# Altium PCB STM32F030F4P6_dev_board.PcbDoc
Units mm, origin at the board's own origin, x right, y up, seen from the top; angles counter-clockwise.
Board outline 35.56 x 29.54 mm, 2 copper layers (Top Layer, Bottom Layer); 18 components, 24 nets, 72 pads, 69 vias.
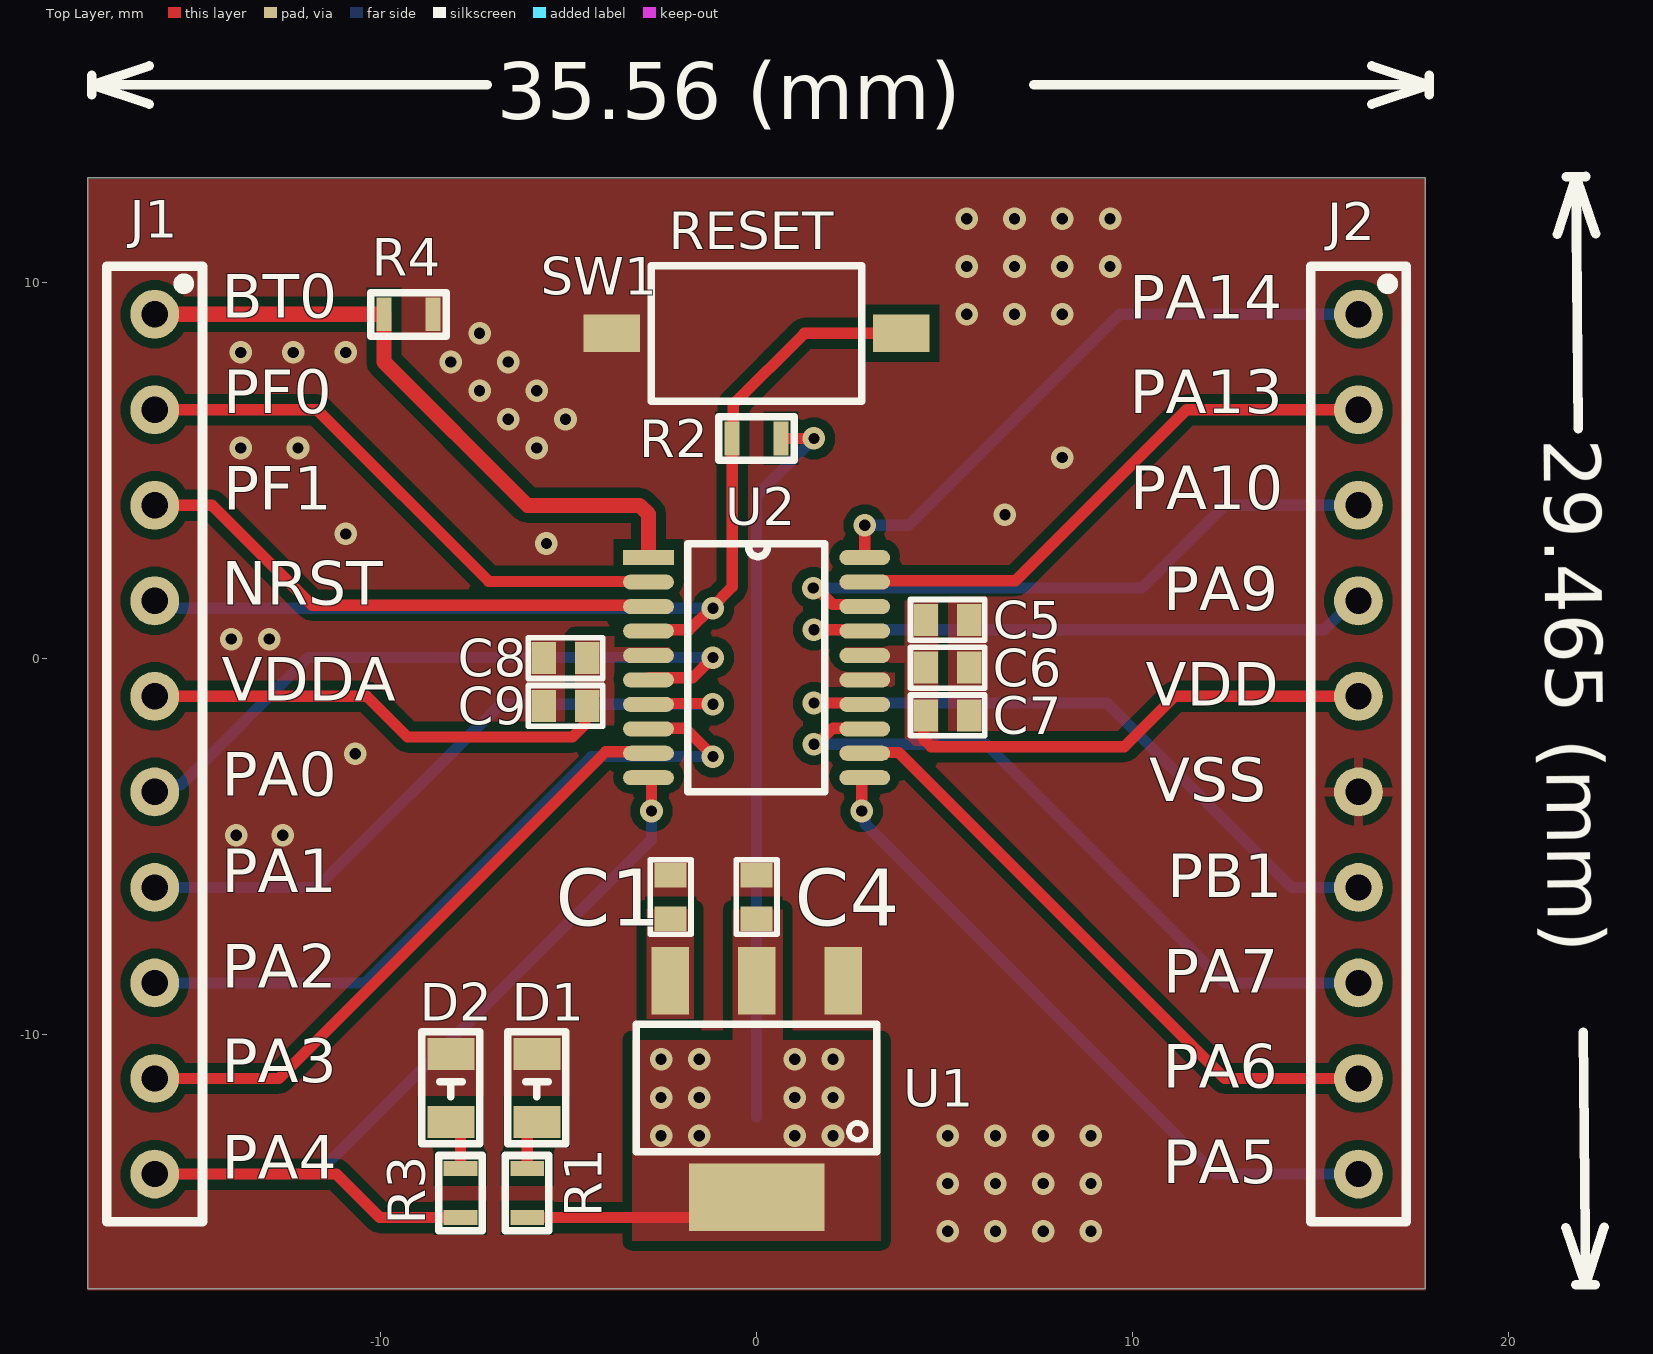
[diagram p0: Top Layer view]
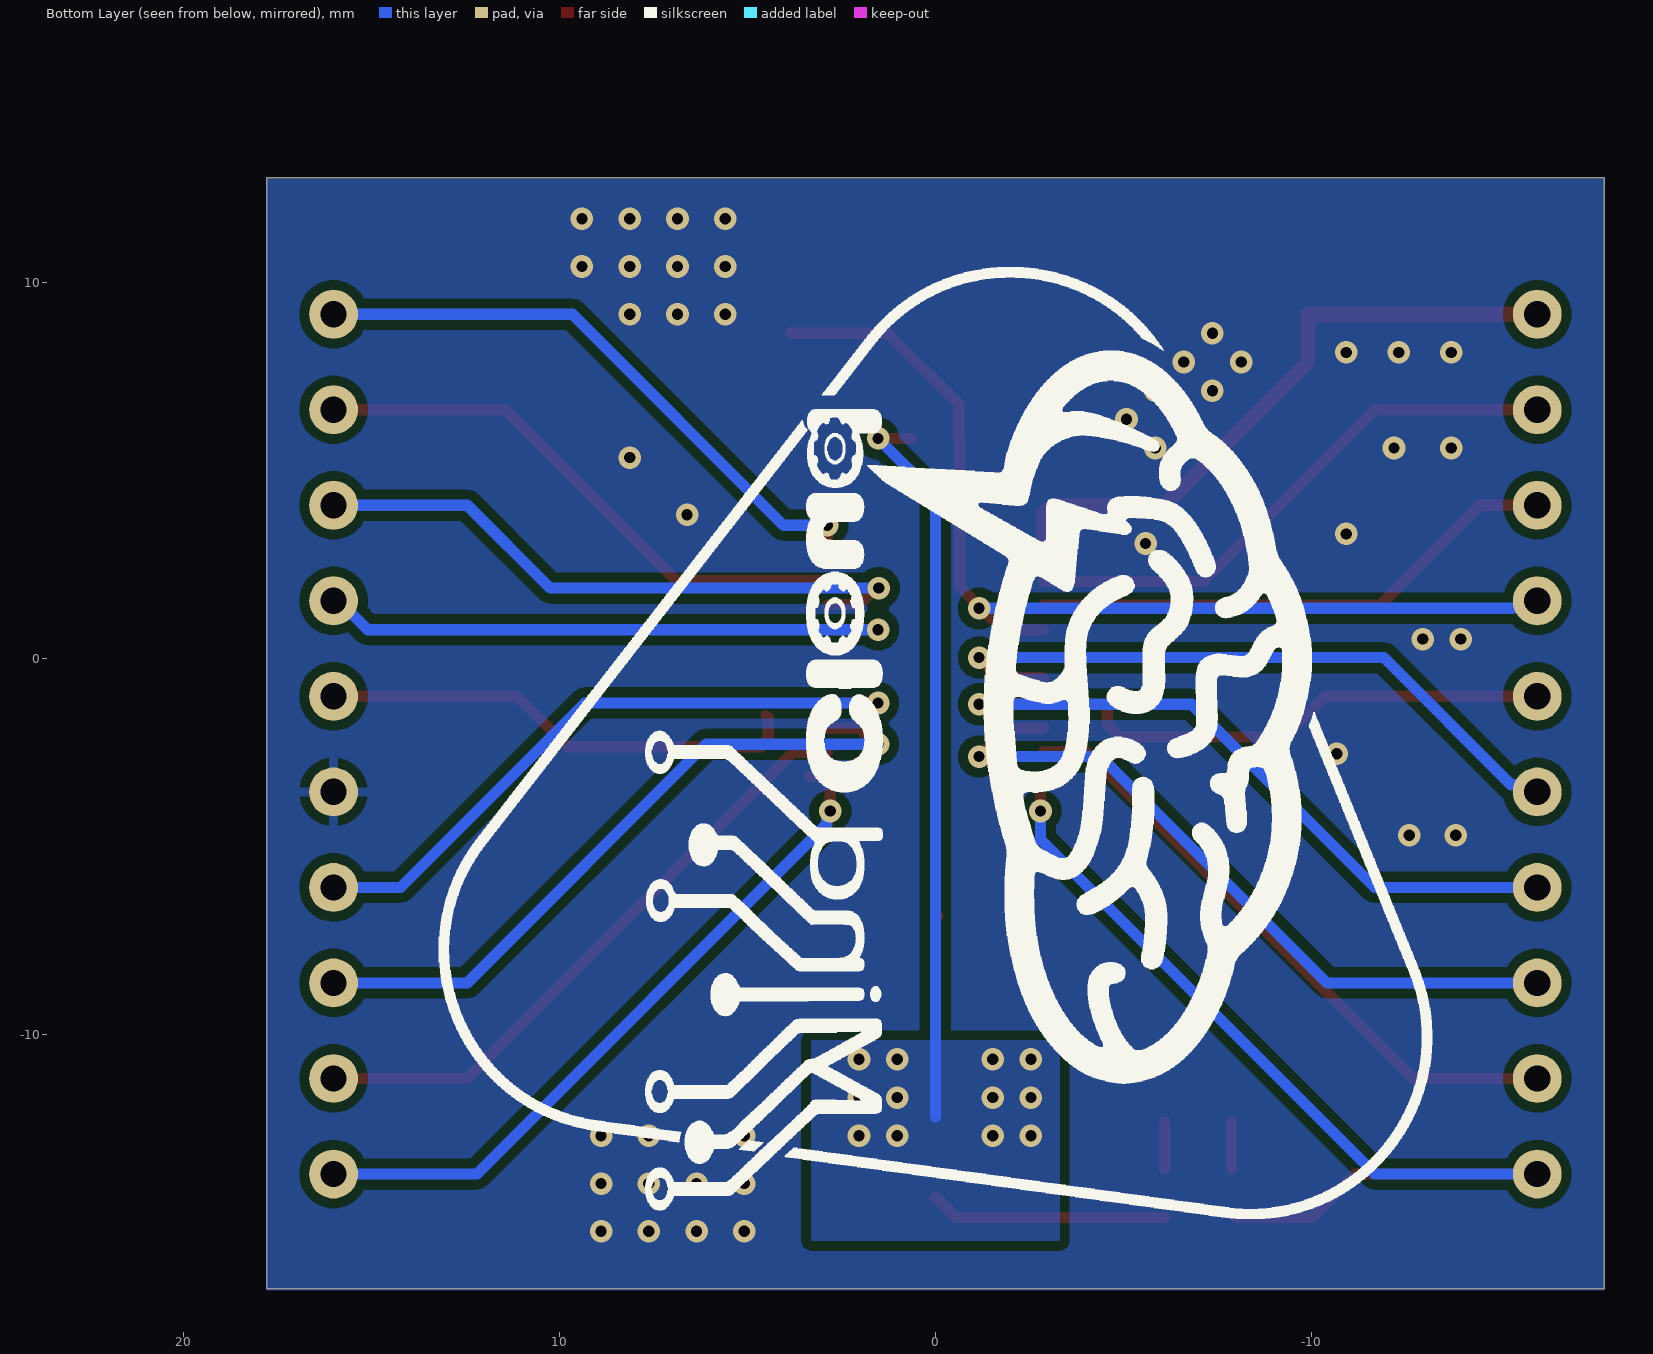
[diagram p1: Bottom Layer view, seen from below]
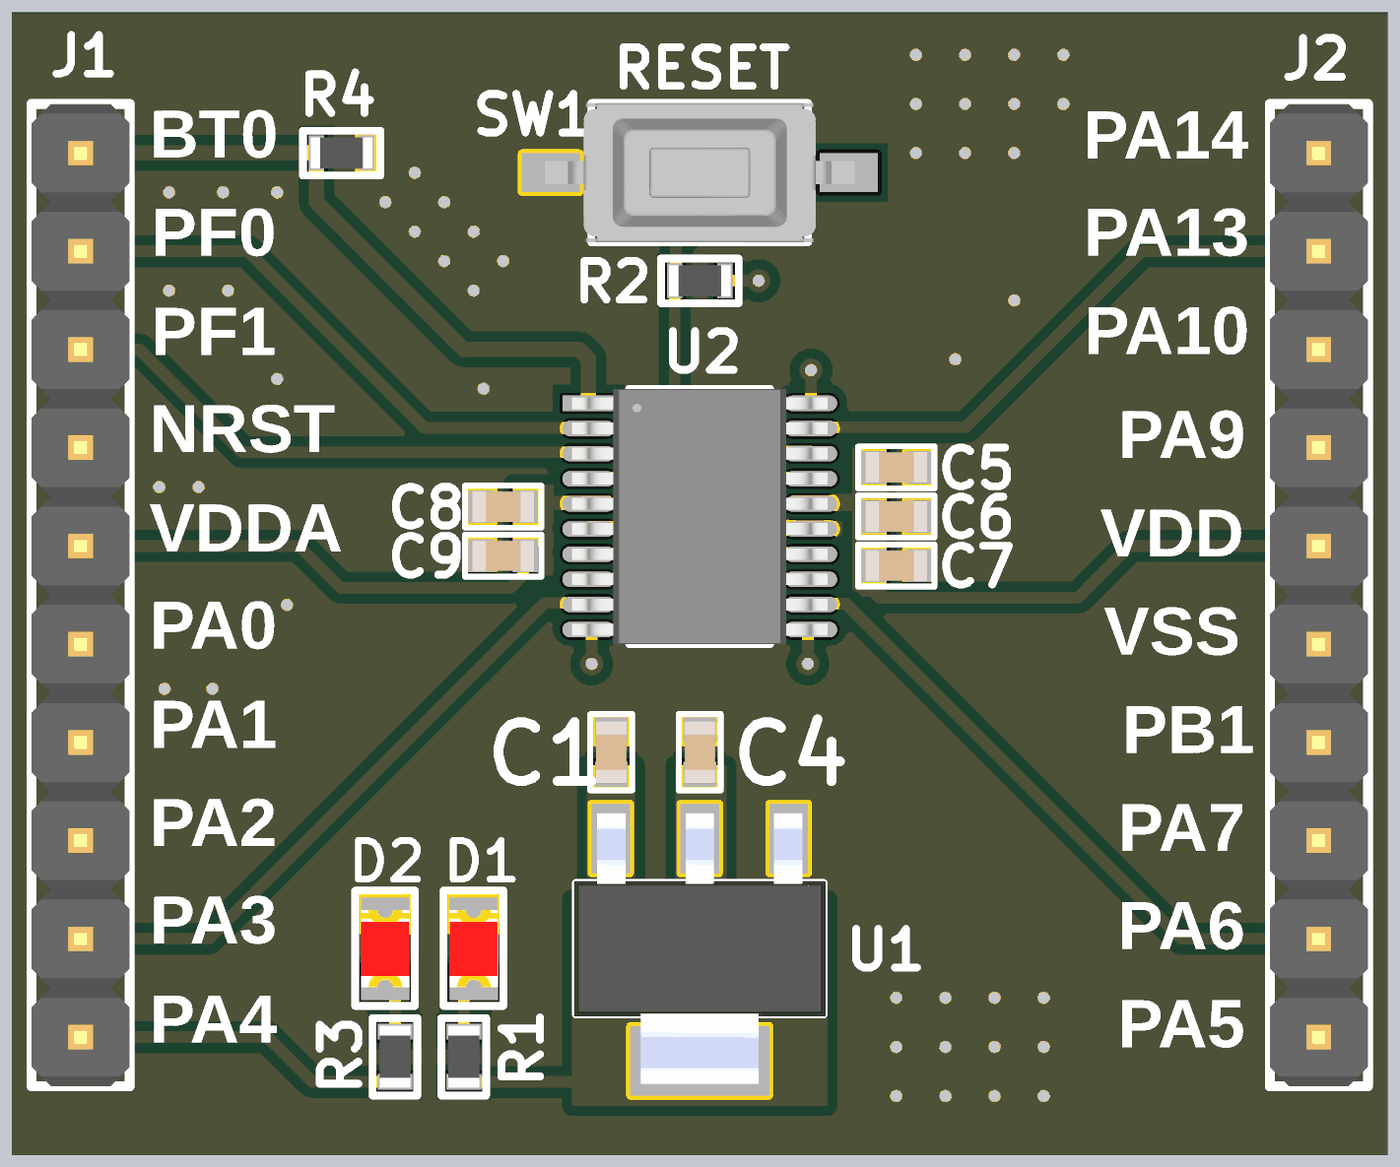
[diagram p2: 3D render of the assembled board from above, using the file's embedded part models]

## Layer stack, top to bottom
Top Solder: solder mask 0.0102, Solder Resist, Dk 3.5
Top Layer: signal copper 0.0356
Dielectric 1: dielectric 0.32, FR-4, Dk 4.8
Bottom Layer: signal copper 0.0356
Bottom Solder: solder mask 0.0102, Solder Resist, Dk 3.5

## Board outline
-17.78,-16.764 17.78,-16.764 17.78,12.777 -17.78,12.777

## Design rules (kind name [scope] priority, off if disabled: settings)
Clearance [All] p1: gap=0.254 ignorepadtopadclearanceinfootprint=FALSE except(0: SMDPad-Hole THPad-Hole Via-Hole Fill-Hole Poly-Hole Region-Hole Text-Hole; 0.127: SMDPad-SMDPad; 0.2: Arc-THPad Track-THPad; 0.3: Arc-Hole Track-Hole)
HoleSize [All] p1: absolutevalues=TRUE maxlimit=6.3 minlimit=0.2 maxpercent=80.000 minpercent=20.000
HoleToHoleClearance [All] p1: gap=0.5 allowstackedmicrovias=TRUE
MinimumAnnularRing [All] p1: minimumring=0.13
PlaneClearance [All] p1: clearance=0.512
PolygonConnect [All] p1: thpad.connectstyle=Relief thpad.reliefconductorwidth=0.254 thpad.reliefentries=4 thpad.polygonreliefangle="90 Angle" thpad.airgapwidth=0.254 smdpad.connectstyle=Direct smdpad.reliefconductorwidth=0.254 smdpad.reliefentries=4 smdpad.polygonreliefangle="90 Angle" smdpad.airgapwidth=0.254 via.connectstyle=Direct via.reliefconductorwidth=0.254 via.reliefentries=4 via.polygonreliefangle="90 Angle" via.airgapwidth=0.254
RoomDefinition STM32F030F4P6_dev_board [InComponentClass('STM32F030F4P6_dev_board')] p1: confinementstyle=ConfineIn formatcopy=TRUE lockcomponents=FALSE outline -115.57,-58.928 -64.77,-58.928 -64.77,-33.528 -115.57,-33.528
RoutingVias [All] p1: holewidth=0.711 width=1.27 viastyle="Through Hole" minholewidth=0.711 minwidth=1.27 maxholewidth=0.711 maxwidth=1.27
SolderMaskExpansion [All] p1: expansion=0.102 istentingtop=FALSE
Width [All] p1: maxlimit=3 minlimit=0.2 preferedwidth=0.8
27 further rules are at their usual default settings.

## Components (designator, comment, footprint, x,y, rotation, side; value= is the part's Value field where it differs from the comment)
C1 "10uF" "Ceramic Capacitor 0603" -2.286,-6.35 r270 top
C4 "10uF" "Ceramic Capacitor 0603" 0,-6.35 r270 top
C5 "4.7uF" "Ceramic Capacitor 0603" 5.08,1.016 r0 top
C6 "100nF" "Ceramic Capacitor 0603" 5.08,-0.254 r180 top
C7 "100nF" "Ceramic Capacitor 0603" 5.08,-1.524 r180 top
C8 "1uF" "Ceramic Capacitor 0603" -5.08,0 r0 top
C9 "10nF" "Ceramic Capacitor 0603" -5.08,-1.27 r180 top
D1 "RED" "LED 0805 SMD" -5.842,-11.43 r90 top
D2 "RED" "LED 0805 SMD" -8.128,-11.43 r90 top
J1 "Pin header 10pin" "Pin header 10pin" -16.002,-2.286 r270 top
J2 "Pin header 10pin" "Pin header 10pin" 16.002,-2.286 r270 top
R1 "62R" "Resistor 0603 SMD" -6.096,-14.224 r90 top
R2 "10K" "Resistor 0603 SMD" 0,5.842 r180 top
R3 "150R" "Resistor 0603 SMD" -7.874,-14.224 r90 top
R4 "10K" "Resistor 0603 SMD" -9.256,9.144 r180 top
SW1 "XKB Connectivity TS-1101-C-W" "XKB Connectivity TS-1101-C-W" 0,8.636 r180 top
U1 "KEXIN AMS1117-3.3" "KEXIN AMS1117-3.3" 0,-11.43 r180 top
U2 "STM32F030F4P6" STM32F030F4P6-TSSOP20 0,-0.254 r0 top

## Footprints (in the part's own frame and the unit in brackets; to place one, negate y for a bottom-side part, rotate by r counter-clockwise, add the part's x,y. Pads: shape width x height; smd on the part's side, far side on the other; paste and mask are expansions set on the pad)
"Ceramic Capacitor 0603" [mm]
  rect 0.65x0.85 smd: 1(-0.575,0) 2(0.575,0)
  silkscreen extent -0.99,-0.54 0.99,0.54, body extent -0.8,-0.4 0.8,0.4, height 0.8
"KEXIN AMS1117-3.3" [mm]
  rect 1x1.8 smd: GND(-2.3,-2.85) VI(2.3,-2.85) VO(0,-2.85)
  rect 3.6x1.8 smd: VO(0,2.9)
  silkscreen extent -3.2,-1.7 3.2,1.7, body extent -3.25,-3.5 3.25,3.5, height 1.8
"LED 0805 SMD" [mm]
  rect 0.85x1.25 smd: A(-0.9,0) C(0.9,0)
  silkscreen extent -1.48,-0.76 1.5,0.78, body extent -1,-0.63 1,0.63, height 1.1
"Pin header 10pin" [mm]
  round 1.3 hole 0.7: 1(-11.43,0) 2(-8.89,0) 3(-6.35,0) 4(-3.81,0) 5(-1.27,0) 6(1.27,0) 7(3.81,0) 8(6.35,0) 9(8.89,0) 10(11.43,0)
  silkscreen extent -12.7,-1.27 12.7,1.27, body extent -12.7,-1.27 12.7,1.27, height 8.6
"Resistor 0603 SMD" [mm]
  rect 0.4x0.9 smd: 1(-0.65,0) 2(0.65,0)
  silkscreen extent -1,-0.57 1,0.58, body extent -0.8,-0.4 0.8,0.4, height 0.55
STM32F030F4P6-TSSOP20 [mm]
  rect 1.35x0.4 smd mask+0.072: 1(-2.875,2.925)
  oval 1.35x0.4 smd mask+0.072: 2(-2.875,2.275) 3(-2.875,1.625) 4(-2.875,0.975) 5(-2.875,0.325) 6(-2.875,-0.325) 7(-2.875,-0.975) 8(-2.875,-1.625) 9(-2.875,-2.275) 10(-2.875,-2.925) 11(2.875,-2.925) 12(2.875,-2.275) 13(2.875,-1.625) 14(2.875,-0.975) 15(2.875,-0.325) 16(2.875,0.325) 17(2.875,0.975) 18(2.875,1.625) 19(2.875,2.275) 20(2.875,2.925)
  silkscreen extent -1.82,-3.3 1.82,3.3, body extent -3.3,-3.3 3.3,3.3, height 1.2
"XKB Connectivity TS-1101-C-W" [mm]
  rect 1.5x1 smd: 1(-3.85,0) 2(3.85,0)
  silkscreen extent -2.8,-1.8 2.8,1.8, body extent -4,-1.8 4,1.8, height 2.5

## Part data
C1 C4: library part "Ceramic Capacitor 0603 10uF", "16V 10uF X5R ±20% 0603 Multilayer Ceramic Capacitors MLCC - SMD/SMT ROHS", Manufacturer=YAGEO, Manufacturer Part Number=CC0603MRX5R7BB106, Supplier Part Number=C109457, Supplier=LCSC
C5: library part "Ceramic Capacitor 0603 4.7uF", "X7R 4.7nF 16V ±10% 0603 Multilayer Ceramic Capacitors MLCC - SMD/SMT ROHS", Manufacturer=YAGEO, Manufacturer Part Number=CC0603KRX7R7BB472, Supplier Part Number=C519419, Supplier=LCSC
C6 C7: library part "Ceramic Capacitor 0603 100nF", "X7R 100nF 16V ±10% 0603 Multilayer Ceramic Capacitors MLCC - SMD/SMT ROHS", Manufacturer=YAGEO, Manufacturer Part Number=CC0603KRX7R7BB104, Supplier Part Number=C108079, Supplier=LCSC
C8: library part "Ceramic Capacitor 0603 1uF", "X7R 1uF 16V ±10% 0603 Multilayer Ceramic Capacitors MLCC - SMD/SMT ROHS", Manufacturer=YAGEO, Manufacturer Part Number=CC0603KRX7R7BB105, Supplier Part Number=C106248, Supplier=LCSC
C9: library part "Ceramic Capacitor 0603 10nF", "50V 10nF X7R ±10% 0603 Multilayer Ceramic Capacitors MLCC - SMD/SMT ROHS", Manufacturer=YAGEO, Manufacturer Part Number=CC0603KRX7R9BB103, Supplier Part Number=C100042, Supplier=LCSC
D1 D2: library part "LED 0805 SMD", Manufacturer="Foshan NationStar Optoelectronics", Manufacturer Part Number=NCD0805R1, Supplier Part Number=C84256, Supplier=LCSC
J1 J2: "Gold 250V 3A Straight Square Pins 2.5mm 10P 260℃ 6mm -40℃~+105℃ 3mm 2.54mm Plugin Black Brass 1x10P Plugin,P=2.54mm Pin Headers ROHS", Manufacturer="XKB Connectivity", Manufacturer Part Number=X6511WV-10H-C60D30, Supplier Part Number=C706882, Supplier=LCSC
R1: library part "Resistor 0603 62R SMD", "100mW Thick Film Resistors ±100ppm/℃ ±1% 62Ω 0603 Chip Resistor - Surface Mount ROHS", Manufacturer=YAGEO, Manufacturer Part Number=RC0603FR-0762RL, Supplier Part Number=C245989, Supplier=LCSC
R2 R4: library part "Resistor 0603 10K SMD", "100mW Thin Film Resistor ±25ppm/℃ ±0.1% 10kΩ 0603 Chip Resistor - Surface Mount ROHS", Manufacturer=YAGEO, Manufacturer Part Number=RT0603BRD0710KL, Supplier Part Number=C95204, Supplier=LCSC
R3: library part "Resistor 0603 150R SMD", "100mW Thick Film Resistors ±100ppm/℃ ±1% 150Ω 0603 Chip Resistor - Surface Mount ROHS", Manufacturer=YAGEO, Manufacturer Part Number=RC0603FR-07150RL, Supplier Part Number=C114608, Supplier=LCSC
SW1: Manufacturer="XKB Connectivity", Manufacturer Part Number=TS-1101-C-W, Supplier Part Number=C318938, Supplier=LCSC
U1: "1A Fixed 3.3V Positive 18V SOT-223-4 Linear Voltage Regulators (LDO) ROHS", Manufacturer=KENIX, Manufacturer Part Number=AMS1117-3.3, Supplier Part Number=C369933, Supplier=LCSC
U2: Manufacturer=STMicroelectronics, Supplier Part Number=C32908, Manufacturer Part Number=STM32F030F4P6, Supplier=LCSC

## Via types
v1: diameter 0.6, hole 0.3, Top Layer to Bottom Layer, tented both sides, 69 vias

## Nets (pads, with @x,y where several pads share a name; then routed paths per layer and width w, separated by ;. In a path a pad name is that pad's centre, name@x,y a point inside that pad or via, vN(x,y) a via of type N, cw(c..) or ccw(c..) an arc to the next point about the centre after c; other vN are vias at no path point)
3V3: C4.2 R1.1 R2.1 U1.VO | length 26
  Top Layer w0.3: R1.1 -0.544,-14.874 U1.VO@0,-14.33 ; C4.2@-0.067,-6.858 C4.2 ; R2.1 v1(1.524,5.842)
  Bottom Layer w0.3: 0,-12.192 0,4.318 v1(1.524,5.842) ; v1@0.959,-11.627 v1(1.016,-11.684)
  other v1: -2.54,-12.7 -1.524,-12.7 1.016,-12.7 2.032,-12.7 -2.54,-11.684 -1.524,-11.684 2.032,-11.684 -2.54,-10.668 -1.524,-10.668 1.016,-10.668 2.032,-10.668
5V0: C1.2 U1.VI
BOOT0: J1.1 R4.2 U2.1 | length 17.2
  Top Layer w0.4: J1.1 R4.2 -9.906,7.874 -6.096,4.064 -3.109,4.064 -2.875,3.83 U2.1@-2.875,2.708
NetD1_A: D1.A R1.2 | length 1.2
  Top Layer w0.3: R1.2 D1.A@-6.096,-12.33
NetD2_A: D2.A R3.2 | length 1.2
  Top Layer w0.3: R3.2 D2.A@-7.874,-12.33
NRST: J1.4 R2.2 SW1.1 U2.4 | length 27.9
  Top Layer w0.3: J1.4@-15.978,1.524 J1.4@-15.748,1.524 ; U2.4@-2.875,0.758 -1.782,0.758 -1.216,1.324 -0.65,1.89 R2.2 -0.624,5.868 -0.624,6.742 1.27,8.636 SW1.1
  Bottom Layer w0.3: J1.4 -15.811,1.333 -15.335,1.333 -15.326,1.324 v1@-1.216,1.324
  other v1: -1.16,1.324
PA0: J1.6 U2.6 | length 18.3
  Top Layer w0.3: U2.6@-2.875,-0.542 -2.856,-0.523 -1.703,-0.523 v1@-1.164,0.015
  Bottom Layer w0.3: J1.6 -15.811,-3.365 -15.303,-3.365 -11.923,0.015 v1(-1.16,0.015)
PA1: J1.7 U2.7 | length 18.6
  Top Layer w0.3: U2.7@-2.894,-1.211 -2.875,-1.192 -2.859,-1.208 -1.176,-1.208 v1(-1.16,-1.224)
  Bottom Layer w0.3: J1.7 -11.684,-6.096 -6.812,-1.224 v1(-1.16,-1.224)
PA2: J1.8 U2.8 | length 19.4
  Top Layer w0.3: U2.8@-2.875,-1.842 -2.856,-1.861 -1.905,-1.861 v1@-1.15,-2.616
  Bottom Layer w0.3: J1.8 -10.414,-8.636 -4.394,-2.616 v1@-1.15,-2.616
  other v1: -1.16,-2.616
PA3: J1.9 U2.9 | length 16.7
  Top Layer w0.3: J1.9 -12.7,-11.176 -4.016,-2.492 U2.9@-2.875,-2.492
PA4: J1.10 R3.1 U2.10 | length 27.2
  Top Layer w0.3: J1.10 -11.176,-13.716 -10.018,-14.874 -7.974,-14.874 R3.1@-7.924,-14.824 ; U2.10@-2.875,-3.142 -2.84,-3.142 -2.794,-3.188 v1(-2.794,-4.064)
  Bottom Layer w0.3: J1.10 -11.684,-13.716 -2.794,-4.826 v1(-2.794,-4.064)
PA5: J2.10 U2.11 | length 18.8
  Top Layer w0.3: v1(2.794,-4.064) 2.794,-3.188 2.84,-3.142 2.875,-3.142 U2.11@3.35,-3.142
  Bottom Layer w0.3: v1(2.794,-4.064) 2.89,-4.16 2.89,-4.414 12.192,-13.716 J2.10
PA6: J2.9 U2.12 | length 16.7
  Top Layer w0.3: U2.12@2.875,-2.492 2.894,-2.511 3.781,-2.511 12.446,-11.176 J2.9
PA7: J2.8 U2.13 | length 18.6
  Top Layer w0.3: v1(1.524,-2.286) 1.605,-2.286 2.03,-1.861 2.856,-1.861 U2.13@2.875,-1.842
  Bottom Layer w0.3: v1(1.524,-2.286) 6.096,-2.286 12.446,-8.636 J2.8
PA9: J2.4 U2.17 | length 16.1
  Top Layer w0.3: v1(1.524,0.758) U2.17@2.875,0.758
  Bottom Layer w0.3: v1(1.524,0.758) 15.098,0.758 15.864,1.524 J2.4
PA10: J2.3 U2.18 | length 17
  Top Layer w0.3: v1(1.506,1.864) 1.587,1.864 2.024,1.427 2.856,1.427 U2.18@2.875,1.408
  Bottom Layer w0.3: v1(1.506,1.864) 10.246,1.864 12.446,4.064 J2.3
PA13: J2.2 U2.19 | length 15
  Top Layer w0.3: U2.19@2.875,2.058 6.884,2.058 11.43,6.604 J2.2
PA14: J2.1 U2.20 | length 16.3
  Top Layer w0.3: U2.20@2.875,2.708 2.877,2.71 v1(2.877,3.53)
  Bottom Layer w0.3: v1(2.877,3.53) 4.038,3.53 9.652,9.144 J2.1
PB1: J2.7 U2.14 | length 17.9
  Top Layer w0.3: v1(1.524,-1.192) 2.875,-1.192 U2.14@2.878,-1.196
  Bottom Layer w0.3: v1(1.524,-1.192) 9.32,-1.192 14.224,-6.096 J2.7
PF0: J1.2 U2.2 | length 15
  Top Layer w0.3: J1.2 -11.684,6.604 -7.119,2.039 -2.894,2.039 U2.2@-2.875,2.058
PF1: J1.3 U2.3 | length 14.2
  Top Layer w0.3: J1.3 -14.478,4.064 -11.822,1.408 U2.3@-2.875,1.408
VDD: C5.1 C6.2 C7.2 J2.5 U2.16 | length 12.9
  Top Layer w0.3: C7.2 4.442,-1.587 4.442,-2.156 4.639,-2.353 9.779,-2.353 11.116,-1.016 J2.5
VDDA: C8.2 C9.1 J1.5 U2.5 | length 12.5
  Top Layer w0.3: J1.5 -10.362,-1.016 -9.279,-2.099 -4.893,-2.099 -4.572,-1.778 -4.572,-1.337 C9.1
VSS: C1.1 C4.1 C5.2 C6.1 C7.1 C8.1 C9.2 D1.C D2.C J2.6 R4.1 SW1.2 U1.GND U2.15
  other v1: 5.08,-15.24 6.35,-15.24 7.62,-15.24 8.89,-15.24 5.08,-13.97 6.35,-13.97 7.62,-13.97 8.89,-13.97 5.08,-12.7 6.35,-12.7 7.62,-12.7 8.89,-12.7 -13.833,-4.709 -12.596,-4.709 -10.668,-2.54 -13.97,0.508 -12.954,0.508 -5.588,3.048 -10.922,3.302 6.604,3.81 8.128,5.334 -13.716,5.588 -12.192,5.588 -5.842,5.588 -6.604,6.35 -5.08,6.35 -7.366,7.112 -5.842,7.112 -8.128,7.874 -6.604,7.874 -13.716,8.128 -12.319,8.128 -10.922,8.128 -7.366,8.636 5.588,9.144 6.858,9.144 8.128,9.144 5.588,10.414 6.858,10.414 8.128,10.414 9.398,10.414 5.588,11.684 6.858,11.684 8.128,11.684 9.398,11.684

## Polygon pours and split planes (outlines as drawn)
VSS on Top Layer "VSS_L01_P013" (solid, remove dead copper, pour order 13): 17.78,12.739 17.78,-16.803 -17.78,-16.803 -17.78,12.739
VDD on Top Layer "VDD_L01_P003" (solid, pour order 3): 2.291,0.325 3.939,0.325 3.939,1.524 4.826,1.524 4.83,1.52 4.83,-2.33 3.939,-2.33 3.939,-0.121 2.291,-0.121
VDDA on Top Layer "VDDA_L01_P000" (solid, pour order 0): -2.286,0.254 -2.317,0.285 -3.778,0.285 -3.778,0.577 -4.826,0.577 -4.826,-1.778 -3.778,-1.778 -3.778,-0.087 -2.286,-0.087
3V3 on Top Layer "3V3_L01_P012" (solid, pour order 12): -3.302,-15.494 -3.302,-10.16 -0.631,-10.16 -0.631,-10.029 -0.631,-8.139 0.69,-8.139 0.69,-10.16 3.302,-10.16 3.302,-15.494
5V0 on Top Layer "5V0_L01_P010" (solid, remove dead copper, pour order 10): -2.923,-9.588 -2.923,-6.68 -1.672,-6.68 -1.672,-9.588
3V3 on Top Layer "3V3_L01_P005" (solid, pour order 5): -0.631,-9.588 -0.631,-6.69 0.69,-6.69 0.69,-9.588
VSS on Bottom Layer "VSS_L02_P014" (solid, pour order 14): 17.78,12.739 17.78,-16.803 -17.78,-16.803 -17.78,12.739
3V3 on Bottom Layer "3V3_L02_P009" (solid, pour order 9): -3.302,-10.16 3.302,-10.16 3.302,-15.494 -3.302,-15.494

## Silkscreen, mask and mechanical layers (free items; w line width, h text height)
Top Overlay:
  lines w0.254: -17.676,14.986 -17.676,15.494 ; -16.152,14.732 -17.676,15.24 ; -16.152,15.748 -17.676,15.24 ; -7.158,15.24 -17.676,15.24 ; 7.366,15.24 17.884,15.24 ; 16.36,14.732 17.884,15.24 ; 16.36,15.748 17.884,15.24 ; 17.884,14.986 17.884,15.494 ; 21.291,11.276 21.786,12.804 ; 21.519,-15.14 22.04,-16.66 ; 21.532,12.802 22.04,12.807 ; 21.786,-16.662 22.294,-16.657 ; 21.844,6.096 21.786,12.804 ; 21.982,-9.951 22.04,-16.66 ; 22.307,11.285 21.786,12.804 ; 22.535,-15.131 22.04,-16.66
  text "35.56 (mm)" at -6.904,14.326 h1.52
  text "RESET" at -2.34,10.868 h1
  text "BT0" at -14.224,8.66 h2
  text "PA14" at 9.906,8.636 h2
  text "PF0" at -14.175,6.12 h2
  text "PA13" at 9.925,6.12 h2
  text "29.465 (mm)" at 20.932,5.834 h1.52 r270.49
  text "PA10" at 9.93,3.58 h2
  text "PF1" at -14.175,3.556 h2
  text "NRST" at -14.224,1.04 h2
  text "PA9" at 10.812,0.892 h2
  text "VDDA" at -14.224,-1.524 h2
  text "VDD" at 10.347,-1.657 h2
  text "PA0" at -14.224,-4.04 h2
  text "VSS" at 10.445,-4.197 h2
  text "PA1" at -14.224,-6.604 h2
  text "PB1" at 10.917,-6.74 h2
  text "PA2" at -14.224,-9.144 h2
  text "PA7" at 10.81,-9.277 h2
  text "PA3" at -14.224,-11.66 h2
  text "PA6" at 10.802,-11.808 h2
  text "PA4" at -14.224,-14.224 h2
  text "PA5" at 10.797,-14.345 h2
Bottom Overlay:
  drawing of 20 lines, arcs and shapes, not listed